# Altium PCB Load_Cell_2.PcbDoc
Units mil, origin at the board's own origin, x right, y up, seen from the top; angles counter-clockwise.
Board outline 6000 x 4000 mil, 2 copper layers (Top Layer, Bottom Layer); 8 components, 10 nets, 35 pads, 1 vias.
Unrouted connection lines stored in the file: 4.
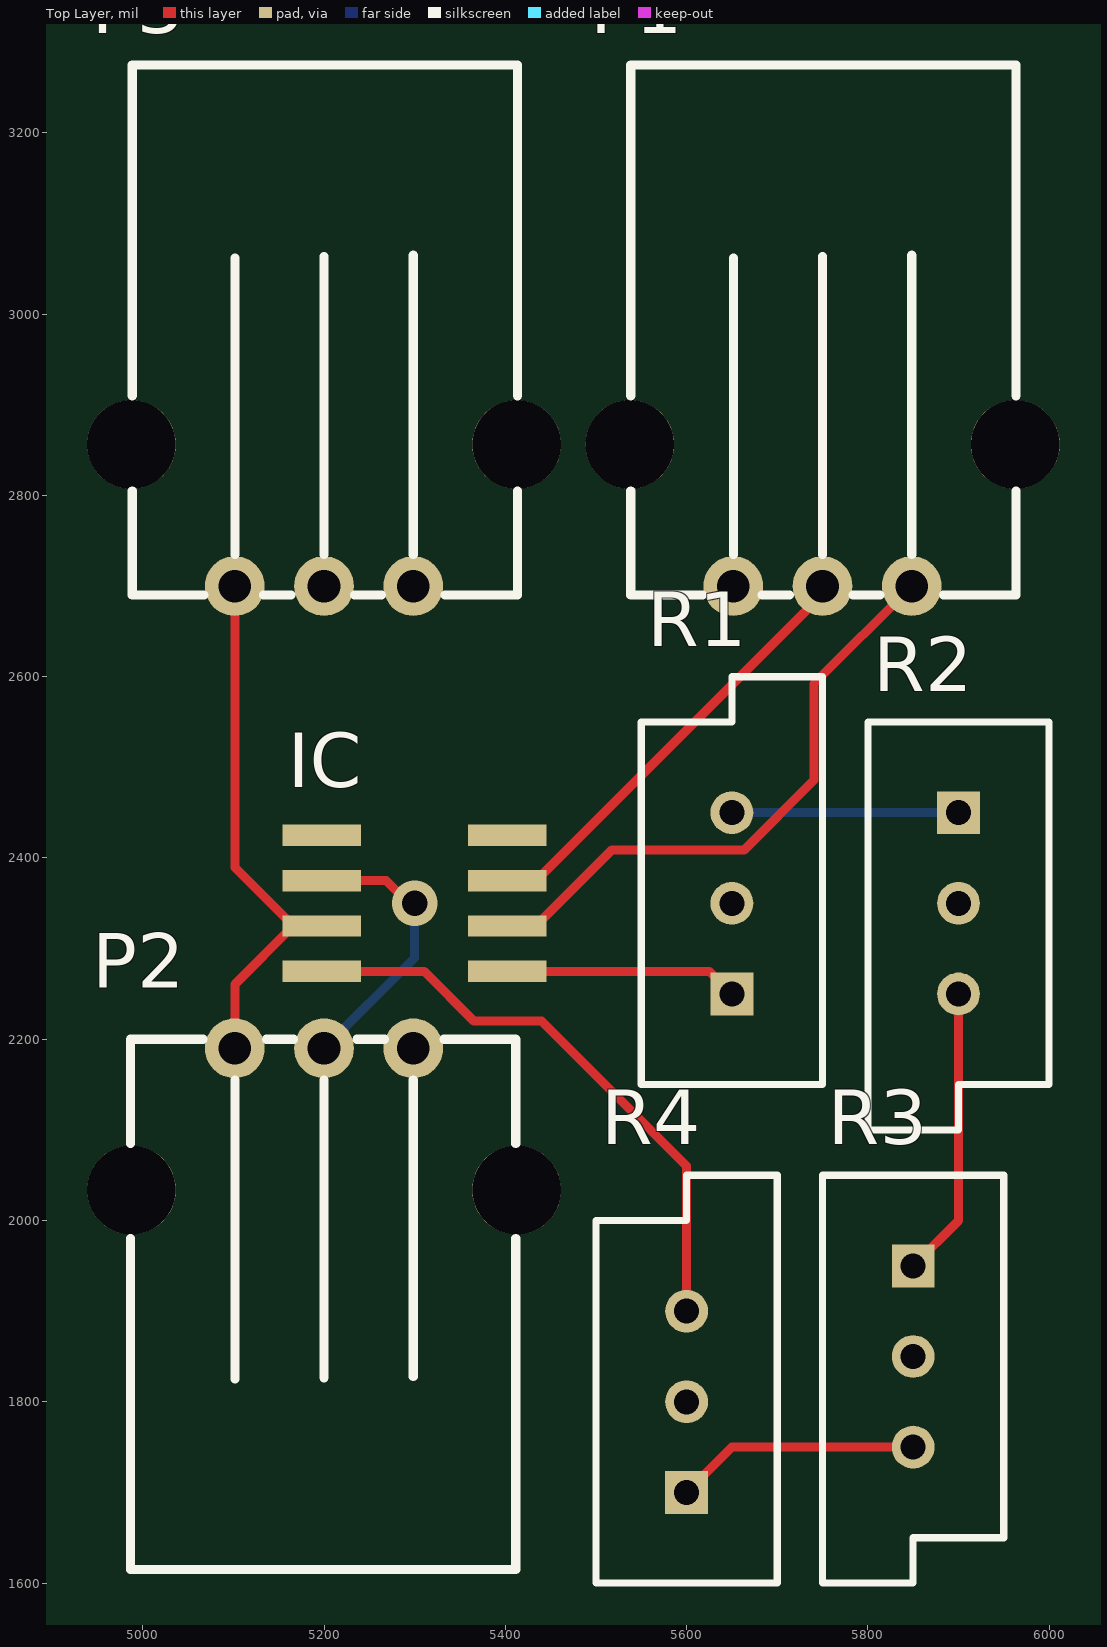
[diagram p0: Top Layer view]
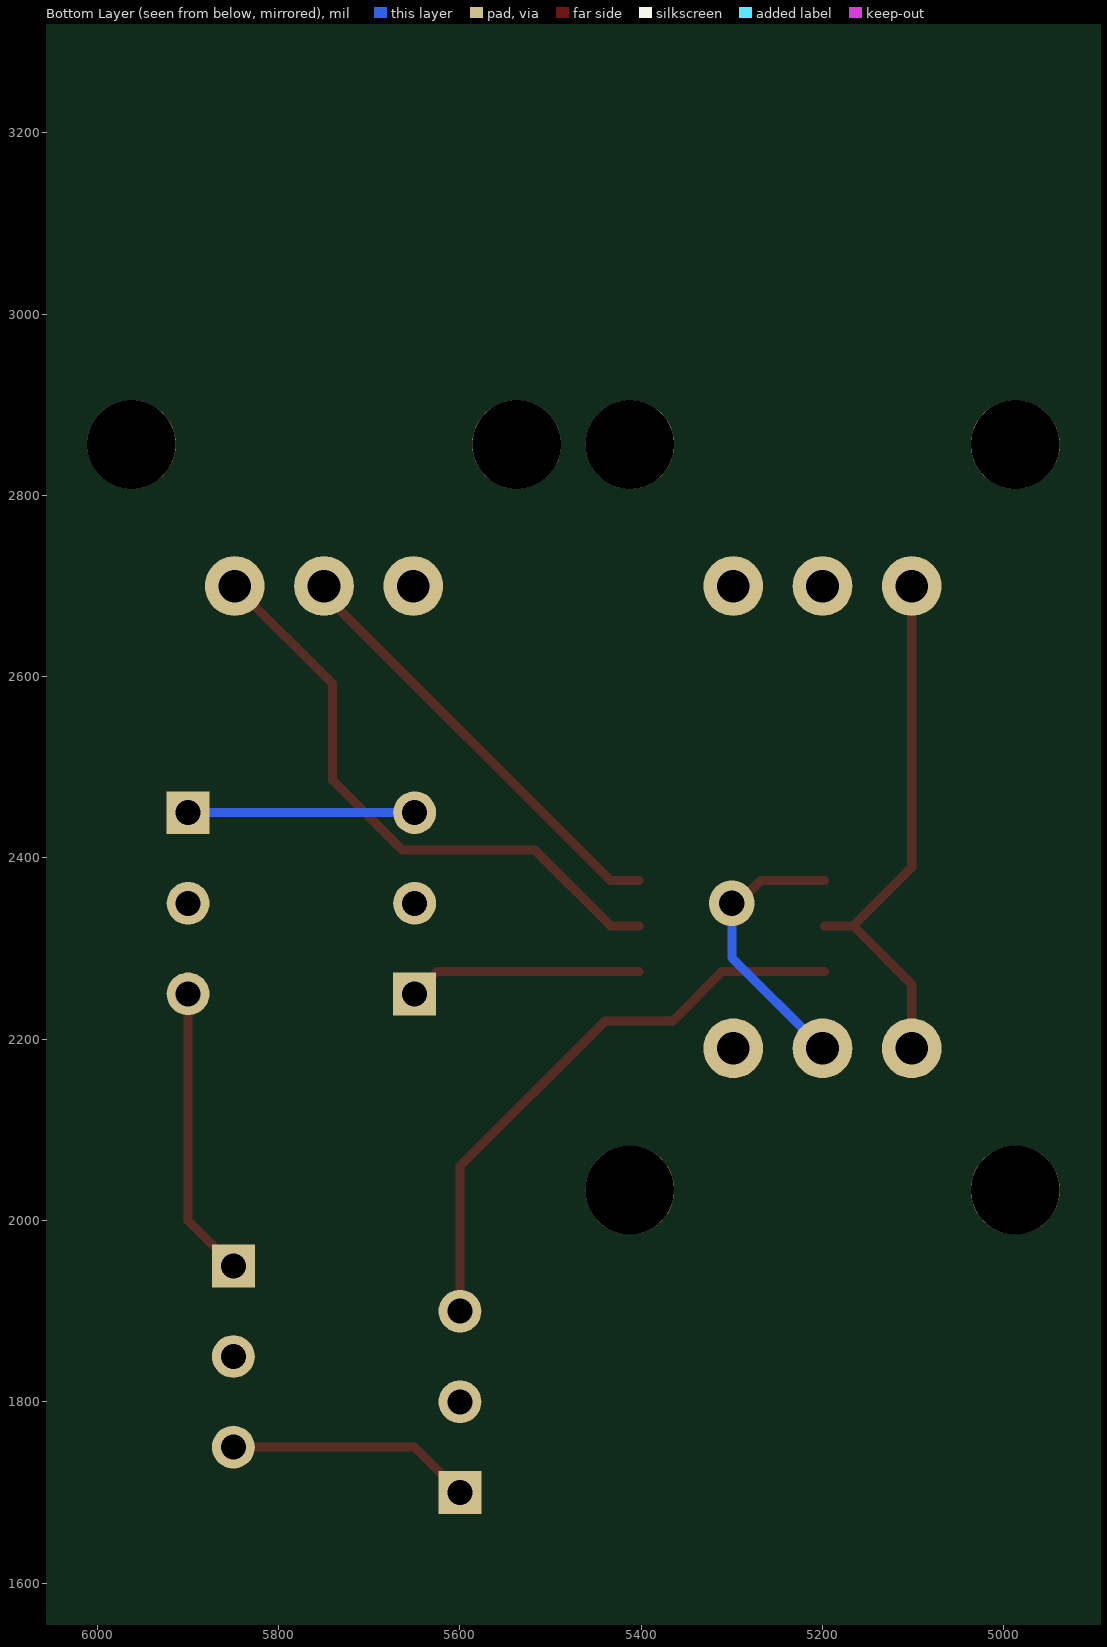
[diagram p1: Bottom Layer view, seen from below]

## Layer stack, top to bottom
Top Solder: solder mask 0.4, Solder Resist, Dk 3.5
Top Layer: signal copper 1.4
Dielectric 1: dielectric 12.6, FR-4, Dk 4.8
Bottom Layer: signal copper 1.4
Bottom Solder: solder mask 0.4, Solder Resist, Dk 3.5

## Board outline
1000,1000 7000,1000 7000,5000 1000,5000

## Design rules (kind name [scope] priority, off if disabled: settings)
Clearance [All] p1: gap=10 ignorepadtopadclearanceinfootprint=FALSE except(0: Arc-Hole Track-Hole SMDPad-Hole THPad-Hole Via-Hole Fill-Hole Poly-Hole Region-Hole Text-Hole)
PolygonConnect [All] p1: connectstyle=Relief reliefconductorwidth=10 reliefentries=4 polygonreliefangle="90 Angle" airgapwidth=10
RoutingVias [All] p1: holewidth=28 width=50 viastyle="Through Hole" minholewidth=28 minwidth=50 maxholewidth=28 maxwidth=50
SolderMaskExpansion [All] p1: expansion=4 istentingtop=FALSE
Width [All] p1: maxlimit=10 minlimit=10 preferedwidth=10
30 further rules are at their usual default settings.

## Components (designator, comment, footprint, x,y, rotation, side; value= is the part's Value field where it differs from the comment)
IC "AD620" SO8 5300,2350 r90 top
P1 "SS-Header 3" PCBComponent_1 5848.43,2700 r270 top
P2 "SS-Header 3" PCBComponent_1 5101.57,2190 r90 top
P3 "SS-Header 3" PCBComponent_1 5298.43,2700 r270 top
R1 "RPot" VR5 5650,2350 r90 top value=1K
R2 "RPot" VR5 5900,2350 r270 top value=1K
R3 "RPot" VR5 5850,1850 r270 top value=1K
R4 "RPot" VR5 5600,1800 r90 top value=1K

## Footprints (in the part's own frame and the unit in brackets; to place one, negate y for a bottom-side part, rotate by r counter-clockwise, add the part's x,y. Pads: shape width x height; smd on the part's side, far side on the other; paste and mask are expansions set on the pad)
PCBComponent_1 [mil]
  round 66 hole 36: 1(0,0) 2(0,-98.43) 3(0,-196.85)
  round 98 hole 98: 4(-156.3,-311.02) 5(-156.3,114.17)
  silkscreen extent -575,-310 10,115
SO8 [mm]
  rect 0.6x2.2 smd: 1(-1.905,-2.6) 2(-0.635,-2.6) 3(0.635,-2.6) 4(1.905,-2.6) 5(1.905,2.6) 6(0.635,2.6) 7(-0.635,2.6) 8(-1.905,2.6)
VR5 [mm] "Thru-Hole; 3 Leads"
  rect 1.2x1.2 hole 0.7: 1(-2.54,0)
  round 1.2 hole 0.7: 2(0,0) 3(2.54,0)
  silkscreen extent -5.08,-2.54 6.35,2.54

## Part data
IC: "Instrumentation Amplifier 1 Circuit 8-SOIC", Package="TSSOP-8 Analog Devices", Availability=Unavailable, MF="Analog Devices", MP=AD620, Price=None, SnapEDA_Link=https://www.snapeda.com/parts/AD620/Analog%20Devices%20Inc./view-part/559692/?ref=snap
P1 P2 P3: library part Component_1, "Slimseal 3-Pin Connector"
R1 R2 R3 R4: "Potentiometer", LatestRevisionDate=17-Jul-2002, LatestRevisionNote="Re-released for DXP Platform.", PackageDescription="Variable Resistor, Thru-Hole; 3 Leads", PackageReference=VR5, Published=8-Jun-2000, Publisher="Altium Limited", Set Position=0.5, Sim Note="Enter the Resistance value and the set point into parameter fields."

## Via types
v1: diameter 50, hole 28, Top Layer to Bottom Layer, 1 vias

## Nets (pads, with @x,y where several pads share a name; then routed paths per layer and width w, separated by ;. In a path a pad name is that pad's centre, name@x,y a point inside that pad or via, vN(x,y) a via of type N, cw(c..) or ccw(c..) an arc to the next point about the centre after c; other vN are vias at no path point)
GND: IC.4 IC.5 P2.3 P3.1 P3.2
NetIC_2: IC.2 P1.1 | length 663.6
  Top Layer w10: IC.2 5433.86,2325 5517.69,2408.83 5663.45,2408.83 5740.48,2485.86 5740.48,2592.05 P1.1
NetIC_3: IC.3 P1.2 | length 487.4
  Top Layer w10: IC.3 5433.86,2375 5750,2691.14 P1.2
NetIC_6: IC.6 P2.2 | length 314.1
  Top Layer w10: IC.6 5268.43,2375 5293.43,2350 v1(5300,2350)
  Bottom Layer w10: P2.2 5300,2290 v1(5300,2350)
NetR1_3: R1.3 R2.1 | length 250
  Bottom Layer w10: R1.3 R2.1
NetR2_3: R2.3 R3.1 | length 320.7
  Top Layer w10: R3.1 5900,2000 R2.3
NetR3_3: R3.3 R4.1 | length 270.7
  Top Layer w10: R4.1 5650,1750 R3.3
Pot_Inp: IC.1 R1.1 | length 258
  Top Layer w10: IC.1 5625,2275 R1.1
Pot_Op: IC.8 R4.3 | length 651.4
  Top Layer w10: IC.8 5310.47,2275 5365.47,2220 5440,2220 5600,2060 R4.3
Vcc: IC.7 P2.1 P3.3 | length 595
  Top Layer w10: P2.1 5101.57,2260.43 IC.7@5166.14,2325 ; P3.3 5101.57,2389.57 IC.7@5166.14,2325 ; IC.7 IC.7@5166.14,2325
pads on no net: P1.3 P1.4 P1.5 P2.4 P2.5 P3.4 P3.5 R1.2 R2.2 R3.2 R4.2